# Altium PCB LaserTagNeopixelBoard.PcbDoc
Units mil, origin at the board's own origin, x right, y up, seen from the top; angles counter-clockwise.
Board outline 1195 x 670 mil, 2 copper layers (Top Layer, Bottom Layer); 5 components, 38 nets, 20 pads, 2 vias.
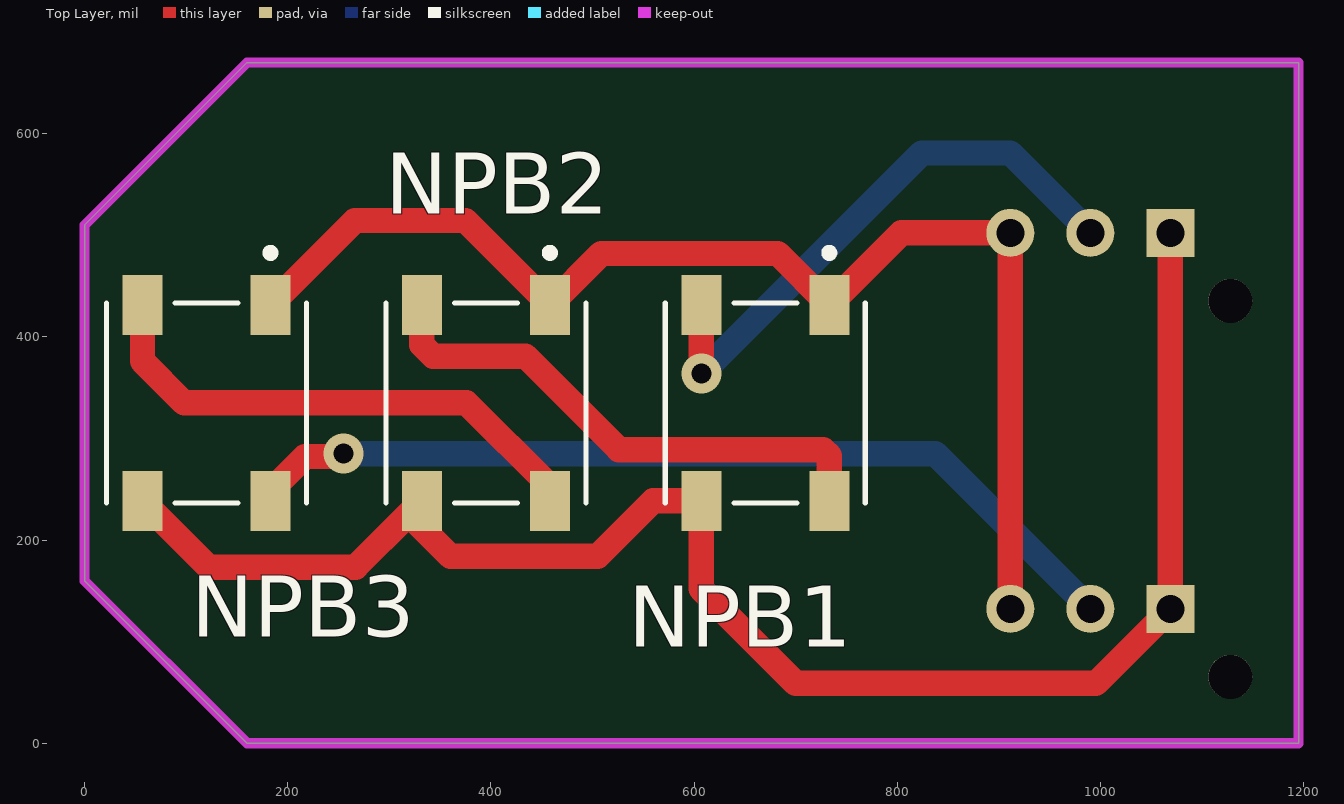
[diagram p0: Top Layer view]
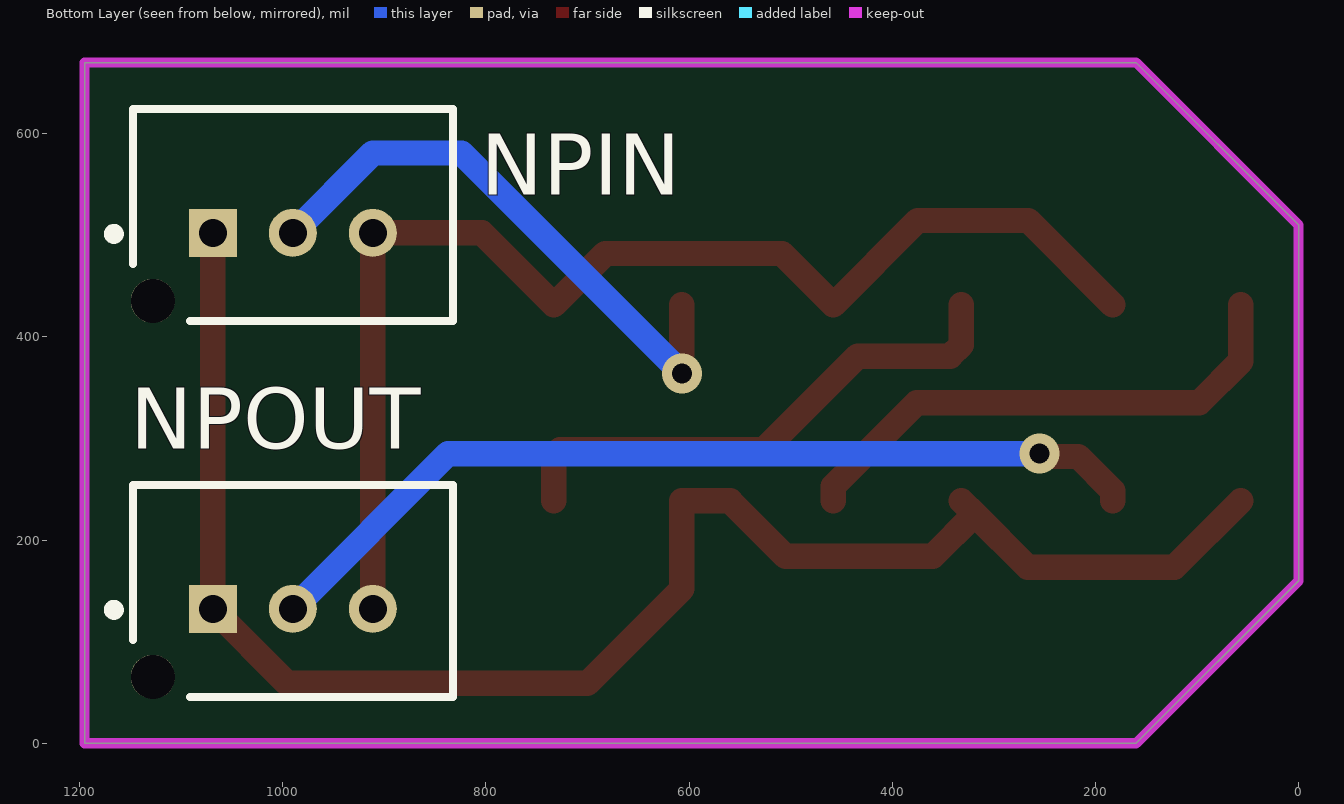
[diagram p1: Bottom Layer view, seen from below]

## Layer stack, top to bottom
Top Solder: solder mask 0.4, Solder Resist, Dk 3.5
Top Layer: signal copper 1.4
Dielectric 1: dielectric 12.6, FR-4, Dk 4.8
Bottom Layer: signal copper 1.4
Bottom Solder: solder mask 0.4, Solder Resist, Dk 3.5

## Board outline
160,670 0,510 0,160 160,0 1195,0 1195,670

## Design rules (kind name [scope] priority, off if disabled: settings)
BoardOutlineClearance [All] p1: gap=7.87 ignorepadtopadclearanceinfootprint=FALSE except(15.75: Arc-SplitBarrior Arc-SplitContinuation Track-SplitBarrior Track-SplitContinuation SMDPad-SplitBarrior SMDPad-SplitContinuation THPad-SplitBarrior THPad-SplitContinuation Via-SplitBarrior Via-SplitContinuation Fill-SplitBarrior Fill-SplitContinuation Poly-SplitBarrior Poly-SplitContinuation Region-SplitBarrior Region-SplitContinuation Text-SplitBarrior Text-SplitContinuation)
Clearance "Clearance Bottom Layer" [OnLayer('Bottom Layer')] p1: gap=8 ignorepadtopadclearanceinfootprint=TRUE except(10: Arc-Text Track-Text SMDPad-Text THPad-Text Via-Text Fill-Text Poly-Text Region-Text Text-Text)
Clearance "Clearance Top Layer" [OnLayer('Top Layer')] p2: gap=8 ignorepadtopadclearanceinfootprint=TRUE except(10: Arc-Text Track-Text SMDPad-Text THPad-Text Via-Text Fill-Text Poly-Text Region-Text Text-Text)
Clearance [All] p3: gap=7.87 ignorepadtopadclearanceinfootprint=FALSE except(3.5: Arc-Arc Arc-Track Arc-SMDPad Track-Track Track-SMDPad SMDPad-SMDPad; 5: Arc-Via Track-Via SMDPad-Via THPad-Via Via-Via; 10: Arc-Text Track-Text SMDPad-Text THPad-Text Via-Text Fill-Text Poly-Text Region-Text Text-Text)
HoleSize [All] p1: absolutevalues=TRUE maxlimit=248.03 minlimit=7.87 maxpercent=80.000 minpercent=20.000
MinimumAnnularRing [All] p1: minimumring=3
MinimumSolderMaskSliver [All] p1: minsoldermaskwidth=3.94
PolygonConnect PolygonConnect_1 [All] p1: thpad.connectstyle=Relief thpad.reliefconductorwidth=20 thpad.reliefentries=4 thpad.polygonreliefangle="90 Angle" thpad.airgapwidth=10 smdpad.connectstyle=Relief smdpad.reliefconductorwidth=20 smdpad.reliefentries=4 smdpad.polygonreliefangle="90 Angle" smdpad.airgapwidth=10 via.connectstyle=Direct via.reliefconductorwidth=20 via.reliefentries=4 via.polygonreliefangle="90 Angle" via.airgapwidth=10
RoutingCorners [All] p1: cornerstyle=Round minsetback=100 maxsetback=100
RoutingVias [All] p1: holewidth=19.68 width=39.37 viastyle="Through Hole" minholewidth=7.87 minwidth=17.72 maxholewidth=39.37 maxwidth=78.74
SilkToSilkClearance [All] p1: silktosilkclearance=3.94
SilkToSolderMaskClearance [IsPad] p1: minsilkscreentomaskgap=3.94 clearancetoexposedcopper=TRUE
SolderMaskExpansion [All] p1: expansion=4 istentingtop=FALSE
Width [All] p1: maxlimit=100 minlimit=3.5 preferedwidth=25 minimp=50.000000 maximp=50.000000 favimp=50.000000
25 further rules are at their usual default settings.

## Components (designator, comment, footprint, x,y, rotation, side; value= is the part's Value field where it differs from the comment)
NPB1 "1655" LED_1655 670,335 r270 top
NPB2 "1655" LED_1655 395,335 r270 top
NPB3 "1655" LED_1655 120,335 r270 top
NPIN "B03B-PASK-1(LF)(SN)" FP-B03B-PASK-1_LF_SN-MFG 990,520 r0 bottom
NPOUT "B03B-PASK-1(LF)(SN)" FP-B03B-PASK-1_LF_SN-MFG 990,150 r0 bottom

## Footprints (in the part's own frame and the unit in brackets; to place one, negate y for a bottom-side part, rotate by r counter-clockwise, add the part's x,y. Pads: shape width x height; smd on the part's side, far side on the other; paste and mask are expansions set on the pad)
FP-B03B-PASK-1_LF_SN-MFG [mm]
  rect 1.2x1.2 hole 0.7 paste-1000 mask+0: 1(2,0.45)
  round 1.2 hole 0.7 paste-1000 mask+0: 2(0,0.45) 3(-2,0.45)
  round 1.1 hole 1.1 unplated paste-1000 mask+0: ""(3.5,2.15)
  silkscreen extent -4,-2.65 4.6,2.65, body extent -4,-2.65 4,2.65, height 7.7
LED_1655 [mm]
  rect 1.5x1 smd: 1(-2.45,1.6) 2(-2.45,-1.6) 3(2.45,-1.6) 4(2.45,1.6)
  silkscreen extent -3.85,-2.5 2.5,2.5

## Part data
NPB1 NPB2 NPB3: "Ws2812b 5050 Rgb Led With Integrated Driver Chip Pack Of 10", Package=None, Availability=Unavailable, MP=1655, Price=None
NPIN NPOUT: library part CMP-17439-000193-1, "CONN HEADER VERT 3POS 2MM", Color=Natural, Current Rating=3A, Flammability Rating="UL94 V-0", Housing Color=White, Voltage Rating=250V, Connector Type=Header, Contact Finish - Mating=TIN, Contact Material="Copper Alloy", Contact Mating Length=0.126inch, Contact Plating=Tin, Contact Shape=Square, Contact Type="Male Pin", Fastening Type=Ramp, Insulation Color=Natural, Insulation Material=PBT, Lead Free="Lead Free", Mated Stacking Heights=14.9mm, Mount="Through Hole", Number of Contacts=3, Number of Positions=3, Number of Rows=1, Orientation=Straight, Packaging=Bulk, Pitch=2mm, Series=PA, Termination=Solder

## Via types
v1: diameter 39.37, hole 19.68, Top Layer to Bottom Layer, 2 vias

## Nets (pads, with @x,y where several pads share a name; then routed paths per layer and width w, separated by ;. In a path a pad name is that pad's centre, name@x,y a point inside that pad or via, vN(x,y) a via of type N, cw(c..) or ccw(c..) an arc to the next point about the centre after c; other vN are vias at no path point)
3V: 
3VESP: 
BAT: NPB1.3 NPB2.3 NPB3.3 NPIN.1 NPOUT.1 | length 1644.1
  Top Layer w25: NPB3.3 122.2,173.35 266.82,173.35 NPB2.3@318.83,225.37 ; NPB2.3 NPB2.3@318.83,225.37 ; NPIN.1 NPOUT.1 995.46,59 700.01,59 607.01,152 NPB1.3 559.54,238.54 505,184 360.2,184 NPB2.3@318.83,225.37
CLIP: 
DATAIN: NPB1.2 NPIN.2 | length 572.9
  Top Layer w25: v1(607.01,364.02) NPB1.2
  Bottom Layer w25: v1(607.01,364.02) 823.99,581 911.28,581 NPIN.2
DATAOUT: NPB3.4 NPOUT.2 | length 895.3
  Top Layer w25: NPB3.4 182.99,248.39 216.86,282.25 252.25,282.25 v1(255,285)
  Bottom Layer w25: v1(255,285) 837.28,285 NPOUT.2
DOUT1: NPB1.4 NPB2.2 | length 530
  Top Layer w25: NPB2.2 332.01,392 343.01,381 434,381 526,289 726.99,289 732.99,283 NPB1.4
DOUT2: NPB2.4 NPB3.2 | length 521.9
  Top Layer w25: NPB3.2 57.01,376 98.01,335 376,335 457.99,253.01 NPB2.4
GND: NPB1.1 NPB2.1 NPB3.1 NPIN.3 NPOUT.3 | length 1238.3
  Top Layer w25: NPB3.1 266.02,514.48 374.96,514.48 NPB2.1 508.54,482 682.45,482 NPB1.1 803.82,502.28 NPIN.3 NPOUT.3
IRE: 
IRR: 
JS1: 
JS2: 
JS3: 
JS4: 
JS5: 
NEOPIX: 
"Net4.7K PDR_1": 
"Net4.7K PUR JS1_1": 
"Net4.7K PUR JS2_1": 
"Net4.7K PUR JS3_1": 
"Net4.7K PUR JS4_1": 
"Net4.7K PUR JS5_1": 
Net10K_1: 
Net10K_2: 
"NetLaser Pointer_2": 
NP: 
NP2: 
NP3: 
PRIMER: 
RST: 
SCL: 
SDA: 
SPKR1: 
SPKR2: 
"SPKR Rx": 
"SPKR Tx": 
TRIGGER: 
pads on no net: NPIN. NPOUT.

## Keep-outs
Keep-Out Layer:
  the board outline again, w10